# Altium PCB PythonCamera.PcbDoc
Units mil, origin at the board's own origin, x right, y up, seen from the top; angles counter-clockwise.
Board outline 6000 x 4000 mil, 2 copper layers (Top Layer, Bottom Layer); 48 components, 58 nets, 250 pads, 0 vias.
Unrouted connection lines stored in the file: 169.
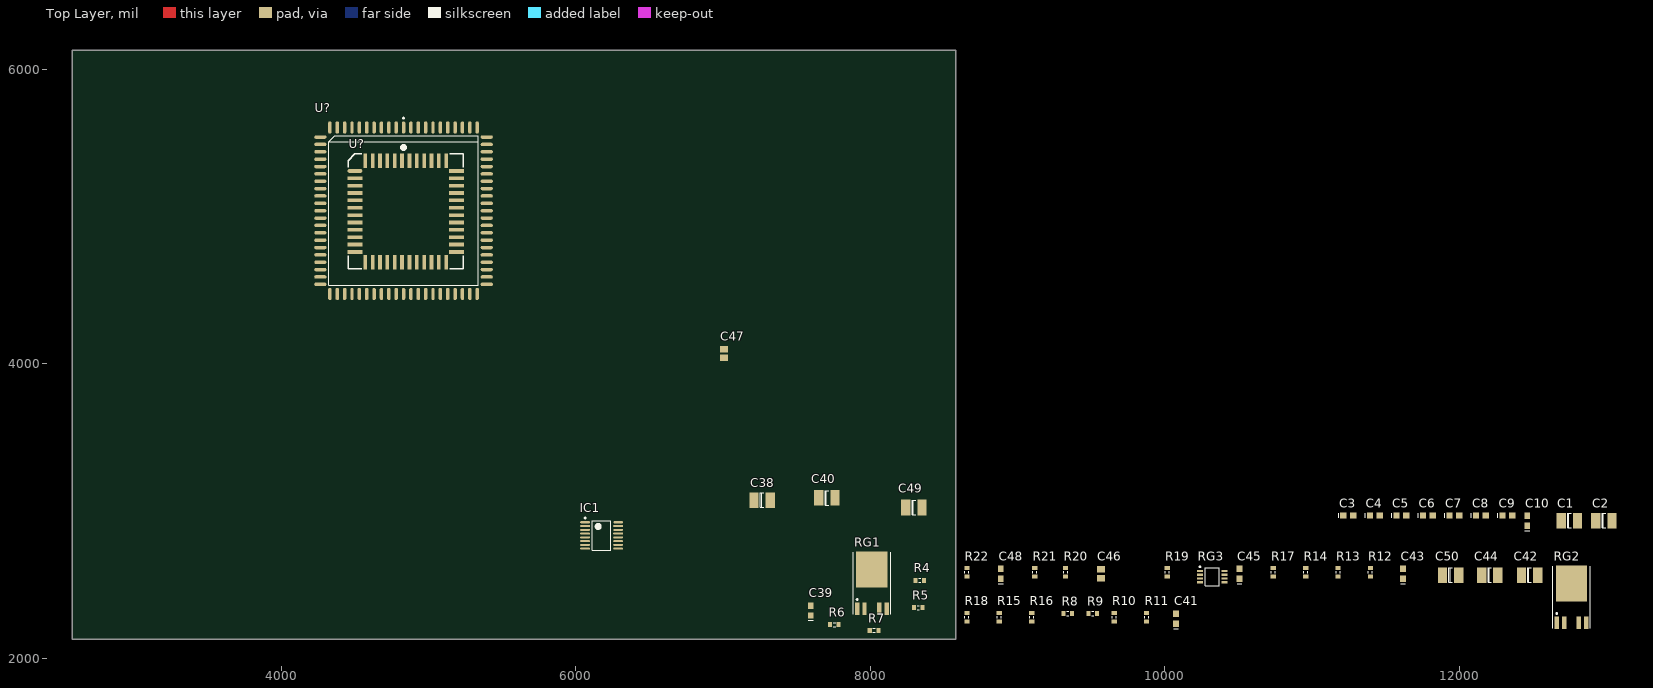
[diagram p0: Top Layer view]
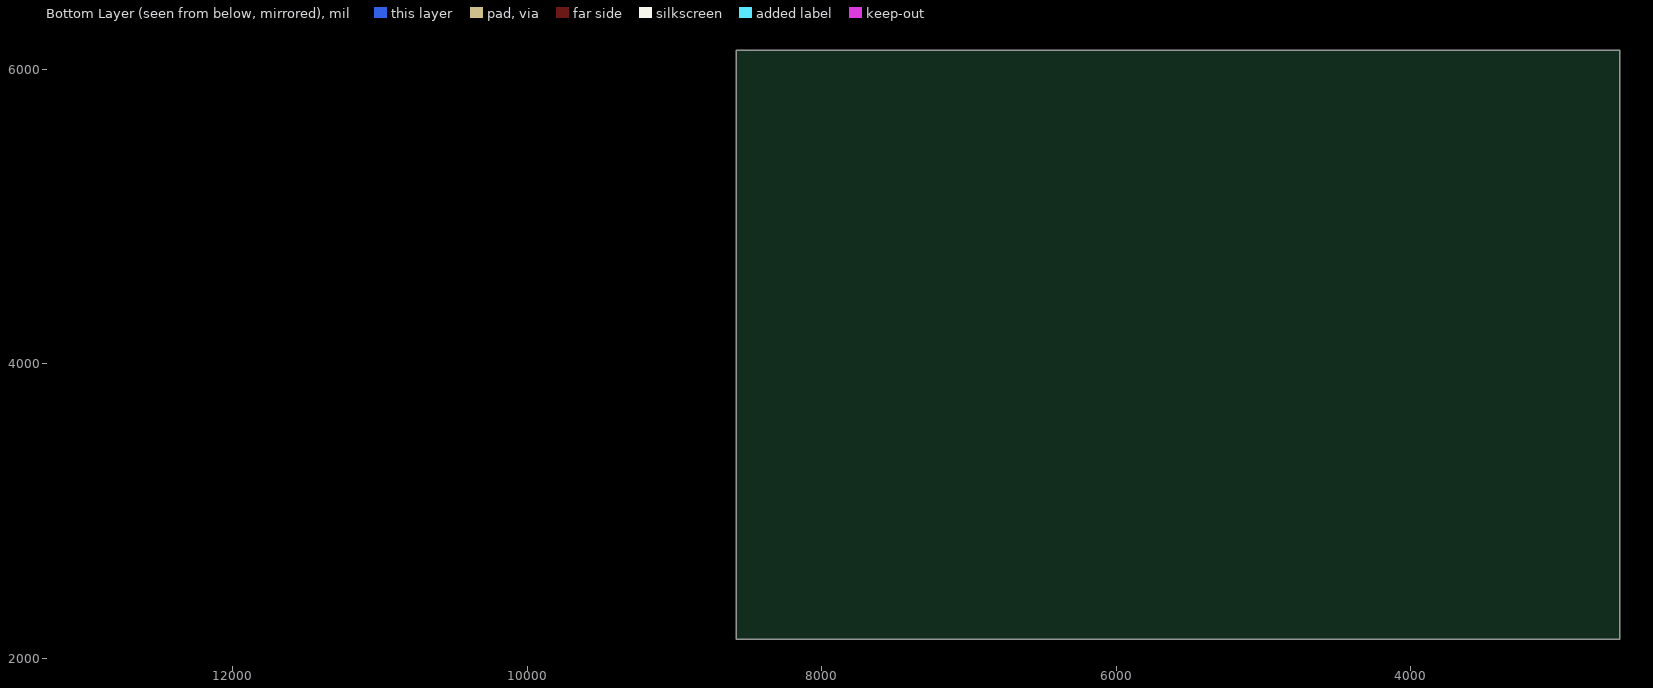
[diagram p1: Bottom Layer view, seen from below]

## Layer stack, top to bottom
Top Solder: solder mask 0.4, Solder Resist, Dk 3.5
Top Layer: signal copper 1.4
Dielectric1: dielectric 12.6, FR-4, Dk 4.8
Bottom Layer: signal copper 1.4
Bottom Solder: solder mask 0.4, Solder Resist, Dk 3.5

## Board outline
2580,2130 2580,6130 8580,6130 8580,2130

## Design rules (kind name [scope] priority, off if disabled: settings)
Clearance [All] p1: gap=10
FabricationTestPointUsage TestPointUsage [All] p1: valid=0 allowmultiple=FALSE
FabricationTestpoint Testpoint [All] p1: side=3 testpointundercomponent=TRUE minsize=40 maxsize=100 preferedsize=60 minholesize=0 maxholesize=40 preferedholesize=32 testpointgrid=1 allowsidetop=TRUE allowsidebottom=TRUE usegrid=TRUE gridtolerance=0.01
PolygonConnect [All] p1: connectstyle=Relief reliefconductorwidth=10 reliefentries=4 polygonreliefangle="90 Angle" airgapwidth=10
RoomDefinition imagesensor [InComponentClass('imagesensor')] p1: confinementstyle=ConfineIn formatcopy=TRUE lockcomponents=FALSE outline 8625,2190 13925,2190 13925,3100 8625,3100
RoomDefinition powerSupply [InComponentClass('powerSupply')] p2: confinementstyle=ConfineIn formatcopy=TRUE lockcomponents=FALSE outline 8625,2190 8770,2190 8770,2390 8625,2390
RoutingVias [All] p1: holewidth=28 width=50 viastyle="Through Hole" minholewidth=28 minwidth=50 maxholewidth=28 maxwidth=50
SilkToSolderMaskClearance SilkscreenOverComponentPads [IsPad] p1: minsilkscreentomaskgap=10 clearancetoexposedcopper=TRUE
SolderMaskExpansion [All] p1: expansion=4
Width [All] p1: maxlimit=10 minlimit=10 preferedwidth=10
27 further rules are at their usual default settings.

## Classes and differential pairs
component class powerSupply: C38 C39 C40 C41 C42 C43 C44 C45 C46 C47 C48 C49 C50 IC1 R4 R5 R6 R7 R8 R9 R10 R11 R12 R13 R14 R15 R16 R17 R18 R19 R20 R21 R22 RG1 RG2 RG3
component class imagesensor: C1 C2 C3 C4 C5 C6 C7 C8 C9 C10 U?

## Components (designator, comment, footprint, x,y, rotation, side; value= is the part's Value field where it differs from the comment)
C1 "T494B" CC3225-1210 12745,2935 r0 top
C2 "T494B" CC3225-1210 12980,2935 r0 top
C3 "C0603" 0603 11245,2970 r0 top
C4 "C0603" 0603 11425,2970 r0 top
C5 "C0603" 0603 11605,2970 r0 top
C6 "C0603" 0603 11785,2970 r0 top
C7 "C0603" 0603 11965,2970 r0 top
C8 "C0603" 0603 12145,2970 r0 top
C9 "C0603" 0603 12325,2970 r0 top
C10 "C0603" 0603 12460,2935 r90 top
C38 "T494B" CC3225-1210 7265,3075 r0 top
C39 "C0603" 0603 7595,2325 r90 top
C40 "T494B" CC3225-1210 7705,3090 r0 top
C41 "C0603" 0603 10075,2270 r90 top
C42 "T494B" CC3225-1210 12475,2565 r0 top
C43 "C0603" 0603 11615,2575 r90 top
C44 "T494B" CC3225-1210 12205,2565 r0 top
C45 "C0603" 0603 10505,2575 r90 top
C46 "Cap Pol3" C0805 9565,2575 r90 top
C47 "Cap Pol3" C0805 7005,4070 r90 top
C48 "C0603" 0603 8885,2575 r90 top
C49 "T494B" CC3225-1210 8295,3025 r0 top
C50 "T494B" CC3225-1210 11940,2565 r0 top
IC1 "CAT9554A, 8bit I2C port expander" TSSOP16_N 6175,2835 r0 top
R4 "Res3" J1-0603 8335,2530 r0 top
R5 "Res3" J1-0603 8325,2345 r0 top
R6 "Res3" J1-0603 7755,2230 r0 top
R7 "Res3" J1-0603 8025,2190 r0 top
R8 "Res3" J1-0603 9340,2305 r0 top
R9 "Res3" J1-0603 9510,2305 r0 top
R10 "Res3" J1-0603 9655,2280 r90 top
R11 "Res3" J1-0603 9875,2280 r90 top
R12 "Res3" J1-0603 11395,2585 r90 top
R13 "Res3" J1-0603 11175,2585 r90 top
R14 "Res3" J1-0603 10955,2585 r90 top
R15 "Res3" J1-0603 8875,2280 r90 top
R16 "Res3" J1-0603 9095,2280 r90 top
R17 "Res3" J1-0603 10735,2585 r90 top
R18 "Res3" J1-0603 8655,2280 r90 top
R19 "Res3" J1-0603 10015,2585 r90 top
R20 "Res3" J1-0603 9325,2585 r90 top
R21 "Res3" J1-0603 9115,2585 r90 top
R22 "Res3" J1-0603 8655,2585 r90 top
RG1 "NCP5661DT18RKG" "D-PAK SIP-G5/Z10.9" 8010,2470 r0 top
RG2 "NCP5661DT33RKG" "D-PAK SIP-G5/Z10.9" 12760,2375 r0 top
RG3 "NCP3335ADMADJR2G," ONSC-MICRO-8-846A-02_H_V 10320,2555 r0 top
U? "Python ISP8 84LCC" PLCC84_L 4830,5040 r0 top
U? "Python ISP8 48LCC" LCC48 4500,5310 r0 top

## Footprints (in the part's own frame and the unit in brackets; to place one, negate y for a bottom-side part, rotate by r counter-clockwise, add the part's x,y. Pads: shape width x height; smd on the part's side, far side on the other; paste and mask are expansions set on the pad)
0603 [mm] "Chip Capacitor; Body 1.6 x 0.8 mm (LxW typ)"
  rect 1.1x1 smd: 1(-0.85,0) 2(0.85,0)
  silkscreen extent -1.7,-0.4 -1.7,0.4
C0805 [mm] "Chip Capacitor, Body 2.0x1.3mm, IPC High Density"
  rect 1.1x1.4 smd: 1(-0.75,0) 2(0.75,0)
  body extent -1.1,-0.72 1.1,0.72, height 1.4
CC3225-1210 [mm] "Chip Capacitor; Body 3.2 x 2.5 mm (LxW typ)"
  rect 1.6x2.7 smd: 1(-1.4,0) 2(1.4,0)
  silkscreen extent -0.3,-1.25 0.3,1.25
"D-PAK SIP-G5/Z10.9" [mm] "D-PAK; 5 Leads (1 Cropped); Body 10.1 (inc. leads) x 6.6 mm (LxW max)"
  rect 0.75x2.1 smd: 1(-2.54,-3.375) 2(-1.27,-3.375) 4(1.27,-3.375) 5(2.54,-3.375)
  rect 5.4x6.2 smd: 3(0,3.375)
  silkscreen extent -3.21,-4.33 3.21,6.38
J1-0603 [mm] "Chip Resistor, Body 1.6x0.8mm, IPC High Density"
  rect 0.7x0.9 smd: 1(-0.75,0) 2(0.75,0)
  silkscreen extent -0.2,-0.35 0.2,0.35, body extent -0.85,-0.48 0.85,0.48, height 0.9
LCC48 [mil]
  oval 100x25 smd: 1(0,0)
  rect 100x25 smd: 2(0,-50) 3(0,-100) 4(0,-150) 5(0,-200) 6(0,-250) 7(0,-300) 8(0,-350) 9(0,-400) 10(0,-450) 11(0,-500) 12(0,-550) 25(690,-550) 26(690,-500) 27(690,-450) 28(690,-400) 29(690,-350) 30(690,-300) 31(690,-250) 32(690,-200) 33(690,-150) 34(690,-100) 35(690,-50) 36(690,0)
  rect 25x100 smd: 13(70,-620) 14(120,-620) 15(170,-620) 16(220,-620) 17(270,-620) 18(320,-620) 19(370,-620) 20(420,-620) 21(470,-620) 22(520,-620) 23(570,-620) 24(620,-620) 37(620,70) 38(570,70) 39(520,70) 40(470,70) 41(420,70) 42(370,70) 43(320,70) 44(270,70) 45(220,70) 46(170,70) 47(120,70) 48(70,70)
  silkscreen extent -45,-665 735,115
ONSC-MICRO-8-846A-02_H_V [mm] "SOIC, 8-Leads, Body 3.1x3.1mm, Pitch 0.65mm"
  rect 1.04x0.38 smd: 1(-2.12,0.975) 2(-2.12,0.325) 3(-2.12,-0.325) 4(-2.12,-0.975) 5(2.12,-0.975) 6(2.12,-0.325) 7(2.12,0.325) 8(2.12,0.975)
  silkscreen extent -2.24,-1.55 1.2,1.84, body extent -1.55,-1.55 1.55,1.55, height 1.1
PLCC84_L [mm] "84-Pin Plastic J-Lead Chip Carrier (PLCC84), IPC High Density"
  oval 0.6x2.1 smd: 1(0,14.35) 2(-1.27,14.35) 3(-2.54,14.35) 4(-3.81,14.35) 5(-5.08,14.35) 6(-6.35,14.35) 7(-7.62,14.35) 8(-8.89,14.35) 9(-10.16,14.35) 10(-11.43,14.35) 11(-12.7,14.35) 33(-12.7,-14.35) 34(-11.43,-14.35) 35(-10.16,-14.35) 36(-8.89,-14.35) 37(-7.62,-14.35) 38(-6.35,-14.35) 39(-5.08,-14.35) 40(-3.81,-14.35) 41(-2.54,-14.35) 42(-1.27,-14.35) 43(0,-14.35) 44(1.27,-14.35) 45(2.54,-14.35) 46(3.81,-14.35) 47(5.08,-14.35) 48(6.35,-14.35) 49(7.62,-14.35) 50(8.89,-14.35) 51(10.16,-14.35) 52(11.43,-14.35) 53(12.7,-14.35) 75(12.7,14.35) 76(11.43,14.35) 77(10.16,14.35) 78(8.89,14.35) 79(7.62,14.35) 80(6.35,14.35) 81(5.08,14.35) 82(3.81,14.35) 83(2.54,14.35) 84(1.27,14.35)
  oval 2.1x0.6 smd: 12(-14.35,12.7) 13(-14.35,11.43) 14(-14.35,10.16) 15(-14.35,8.89) 16(-14.35,7.62) 17(-14.35,6.35) 18(-14.35,5.08) 19(-14.35,3.81) 20(-14.35,2.54) 21(-14.35,1.27) 22(-14.35,0) 23(-14.35,-1.27) 24(-14.35,-2.54) 25(-14.35,-3.81) 26(-14.35,-5.08) 27(-14.35,-6.35) 28(-14.35,-7.62) 29(-14.35,-8.89) 30(-14.35,-10.16) 31(-14.35,-11.43) 32(-14.35,-12.7) 54(14.35,-12.7) 55(14.35,-11.43) 56(14.35,-10.16) 57(14.35,-8.89) 58(14.35,-7.62) 59(14.35,-6.35) 60(14.35,-5.08) 61(14.35,-3.81) 62(14.35,-2.54) 63(14.35,-1.27) 64(14.35,0) 65(14.35,1.27) 66(14.35,2.54) 67(14.35,3.81) 68(14.35,5.08) 69(14.35,6.35) 70(14.35,7.62) 71(14.35,8.89) 72(14.35,10.16) 73(14.35,11.43) 74(14.35,12.7)
  silkscreen extent -12.9,-12.9 12.9,16.07, body extent -14.7,-14.7 14.7,14.7, height 4.58
TSSOP16_N [mm] "TSOP, 16-Leads, Body 5x4.4mm, Pitch 0.65mm, IPC Medium Density"
  oval 1.7x0.35 smd: 1(-2.85,2.275) 2(-2.85,1.625) 3(-2.85,0.975) 4(-2.85,0.325) 5(-2.85,-0.325) 6(-2.85,-0.975) 7(-2.85,-1.625) 8(-2.85,-2.275) 9(2.85,-2.275) 10(2.85,-1.625) 11(2.85,-0.975) 12(2.85,-0.325) 13(2.85,0.325) 14(2.85,0.975) 15(2.85,1.625) 16(2.85,2.275)
  silkscreen extent -2.97,-2.55 1.6,3.12, body extent -2.25,-2.55 2.25,2.55, height 1.1

## Part data
C1 C2 C38 C40 C42 C44 C49 C50: "Solid Tantalum Chip Capacitor, Standard T494 Series - Low ESR, Industrial Grade"
C3 C4 C5 C6 C7 C8 C9 C10 C39 C41 C43 C45 C48: "Ceramic Chip Capacitor - Standard"
C46 C47: "Polarized Capacitor (Surface Mount)"
IC1: library part CAT9554A, "8bit I2C port expander"
R4 R5 R6 R7 R8 R9 R10 R11 R12 R13 R14 R15 R16 R17 R18 R19 R20 R21 R22: "Resistor"
RG1 RG2: library part NCP5661, "Low Dropout Voltage Regulator"
RG3: library part NCP3335, "NCP3335ADMADJR2G, ADJ Ultra High Accuracy, Low Iq, 500 mA Low Dropout Regulator"
U?: "MAX 9000 PLD with 191 I/O Pins, 240-Pin RQFP, Industrial Grade"
U?: "Python ISP8 28LCC"

## Nets (pads, with @x,y where several pads share a name; then routed paths per layer and width w, separated by ;. In a path a pad name is that pad's centre, name@x,y a point inside that pad or via, vN(x,y) a via of type N, cw(c..) or ccw(c..) an arc to the next point about the centre after c; other vN are vias at no path point)
5V: C44.1 C47.1 C50.1 RG2.2 RG3.7 RG3.8
+5: C40.1 C49.1 RG1.2
CLK_PLL: U?.25@5190,4760 U?.44@4880,4475.04
CLOCK_IN_N: U?.23@5070,4690 U?.41@4730,4475.04
CLOCK_IN_P: U?.24@5120,4690 U?.42@4780,4475.04
CLOCK_OUT_N: U?.7@4500,5010 U?.15@4265.04,5390
CLOCK_OUT_P: U?.8@4500,4960 U?.14@4265.04,5440
DOUT0_N: U?.9@4500,4910 U?.10@4380,5604.96
DOUT0_P: U?.10@4500,4860 U?.11@4330,5604.96
DOUT1_N: U?.8@4480,5604.96 U?.11@4500,4810
DOUT1_P: U?.9@4430,5604.96 U?.12@4500,4760
DOUT2_N: U?.13@4570,4690 U?.16@4265.04,5340
DOUT2_P: U?.14@4620,4690 U?.17@4265.04,5290
DOUT3_N: U?.15@4670,4690 U?.18@4265.04,5240
DOUT3_P: U?.16@4720,4690 U?.19@4265.04,5190
DOUT4_N: U?.25@4265.04,4890
DOUT4_P: U?.26@4265.04,4840
DOUT5_N: U?.27@4265.04,4790
DOUT5_P: U?.28@4265.04,4740
DOUT6_N: U?.35@4430,4475.04
DOUT6_P: U?.36@4480,4475.04
DOUT7_N: U?.33@4330,4475.04 U?.34@4380,4475.04
ENABLE_VDD_18: IC1.4 R6.1 R7.2
ENABLE_VDD_33: IC1.5 R14.1 R17.2
ENABLE_VDD_PIX: IC1.6 R21.1 R22.2
GND: C1.2 C2.2 C3.1 C4.1 C5.1 C6.1 C7.1 C8.1 C9.1 C10.1 C38.2 C40.2 C41.1 C42.2 C44.2 C45.2 C46.2 C47.2 C49.2 C50.2 IC1.1 IC1.2 IC1.8 R5.1 R7.1 R8.1 R9.1 R13.1 R15.1 R16.1 R17.1 R18.1 R19.2 R22.1 RG1.3 RG2.3 RG3.4 U?.5@4500,5110 U?.6@4580,5604.96 U?.20 U?.21@4970,4690 U?.24@4265.04,4940 U?.27@5190,4860 U?.30@5190,5010 U?.32@5190,5110 U?.34@5190,5210 U?.35@5190,5260 U?.37@5120,5380 U?.38@4580,4475.04 U?.39 U?.46@4980,4475.04 U?.48@4570,5380 U?.50 U?.58 U?.61 U?.62 U?.65 U?.67 U?.80 U?.84
IBIAS_MASTER: U?.28@5190,4910 U?.47@5030,4475.04
MISO: U?.3@4500,5210 U?.4@4680,5604.96
MONITOR_0: U?.44@4770,5380 U?.78
MONITOR_1: U?.45@4720,5380 U?.81
MOSI: U?.2@4500,5260 U?.3@4730,5604.96
NetC39_1: C39.1 R4.1 R5.2 RG1.5
NetC43_1: C43.1 R12.1 R13.2 RG2.5
NetC45_1: C45.1 RG3.5
NetC48_2: C48.2 R19.1 R20.2 RG3.3
NetR6_2: R6.2 RG1.1
NetR14_2: R14.2 RG2.1
NetR21_2: R21.2 RG3.6
RESET_N: U?.46@4670,5380 U?.82
REV0: IC1.7 R8.2
REV1: IC1.9 R9.2
REV2: IC1.10 R15.2
REV3: IC1.11 R16.2
REV4: IC1.12 R18.2
SCL: IC1.14 R10.1
SCLK: U?.4@4500,5160 U?.5@4630,5604.96
SDA: IC1.15 R11.1
SS_N: U?.47@4620,5380 U?.83
SYNC_N: U?.17@4770,4690 U?.29@4265.04,4690
SYNC_P: U?.18@4820,4690 U?.30@4265.04,4640
TRIGGER_0: U?.41@4920,5380 U?.70
TRIGGER_1: U?.42@4870,5380 U?.71
TRIGGER_2: U?.43@4820,5380 U?.72
VCC: C41.2 R10.2 R11.2
VDD_18: C38.1 C39.2 R4.2 RG1.4 U?.6@4500,5060 U?.7@4530,5604.96 U?.21@4265.04,5090 U?.22@5020,4690 U?.26@5190,4810 U?.40@4680,4475.04 U?.45@4930,4475.04
VDD_33: C1.1 C2.1 C3.2 C4.2 C5.2 C6.2 C7.2 C8.2 C9.2 C10.2 C42.1 C43.2 R12.2 RG2.4 U?.1 U?.19@4870,4690 U?.23@4265.04,4990 U?.29@5190,4960 U?.36@5190,5310 U?.37@4530,4475.04 U?.49 U?.63 U?.79
VDD_PIX: C46.1 C48.1 R20.1 RG3.1 RG3.2 U?.31@5190,5060 U?.33@5190,5160 U?.38@5070,5380 U?.40@4970,5380 U?.57 U?.60 U?.66 U?.68
VIO: IC1.3 IC1.16
pads on no net: IC1.13 U?.2@4780,5604.96 U?.12@4265.04,5540 U?.13@4265.04,5490 U?.22@4265.04,5040 U?.31@4265.04,4590 U?.32@4265.04,4540 U?.43@4830,4475.04 U?.48@5080,4475.04 U?.51 U?.52 U?.53 U?.54 U?.55 U?.56 U?.59 U?.64 U?.69 U?.73 U?.74 U?.75 U?.76 U?.77

## Silkscreen, mask and mechanical layers (free items; w line width, h text height)
Mechanical 16:
  drawing of 1878 lines, arcs and shapes, not listed
  text "1" at 1427,7465 h70
  text "2" at 4287,7465 h70
  text "3" at 7167,7465 h70
  text "4" at 10037,7465 h70
  text "A" at 75,6559 h70
  text "A" at 11375,6559 h70
  text "B" at 75,4667 h70
  text "B" at 11375,4667 h70
  text "C" at 75,2757 h70
  text "C" at 11375,2757 h70
  text "ENGINEER:" at 6850,1300 h45
  text "TITLE:" at 8350,1300 h45
  text "PCB DESIGNER:" at 6850,1005 h45
  text "D" at 75,867 h70
  text "D" at 11375,867 h70
  text "DATE:" at 6850,700 h45
  text "PART NO.:" at 8350,700 h45
  text "REV:" at 10450,700 h45
  text "Altium Limited" at 5550,600 h70
  text ".PRINT_DATE" at 6900,580 h70
  text "12a Rodborough Rd" at 5550,500 h70
  text "Frenchs Forest" at 5550,400 h70
  text "FILE NAME:" at 6850,400 h45
  text "DWG NO:" at 8350,400 h45
  text "SCALE:" at 10450,400 h45
  text "NSW 2086" at 5550,300 h70
  text ".PCB_FILE_NAME_NO_PATH" at 6900,280 h70
  text "1" at 1427,65 h70
  text "2" at 4287,65 h70
  text "3" at 7167,65 h70
  text "4" at 10037,65 h70